# Altium PCB Power_2.PcbDoc
Units mm, origin at the board's own origin, x right, y up, seen from the top; angles counter-clockwise.
Board outline 131.06 x 43.05 mm, 2 copper layers (Top Layer, Bottom Layer); 22 components, 93 nets, 76 pads, 0 vias.
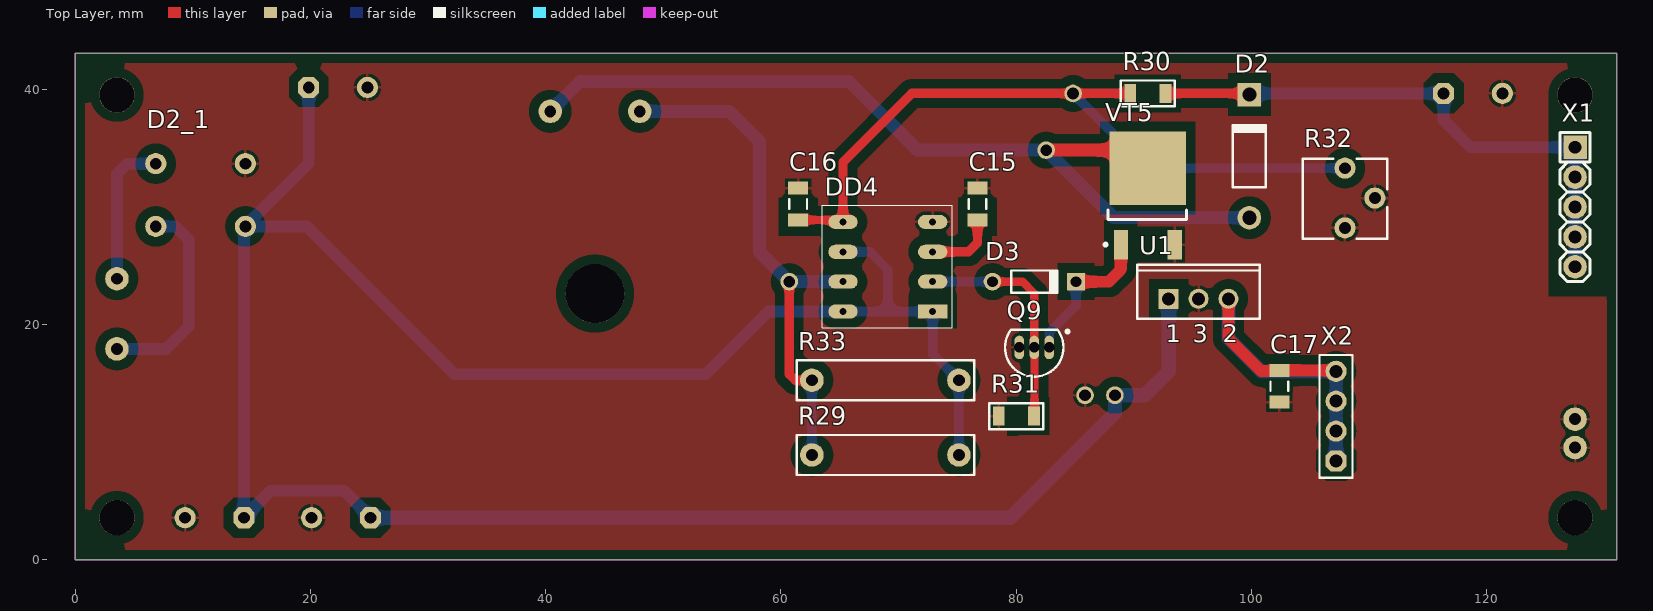
[diagram p0: Top Layer view]
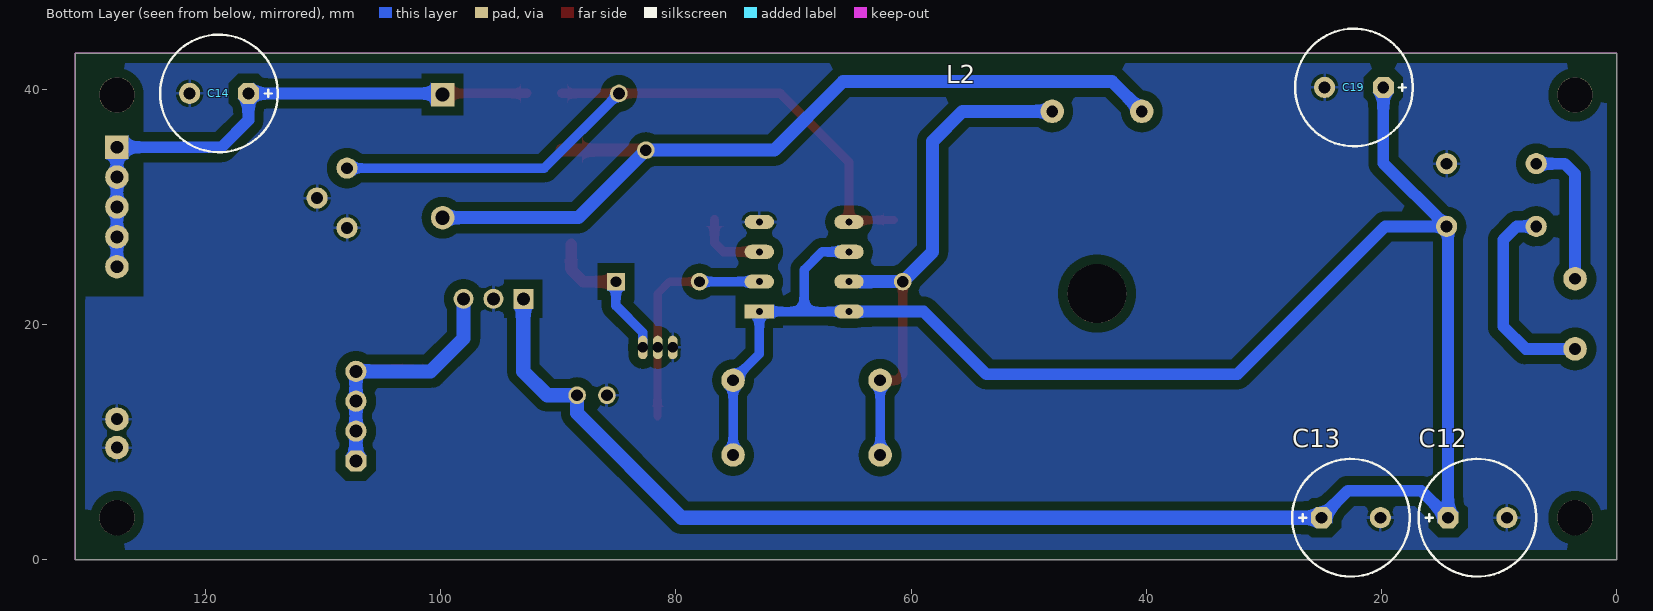
[diagram p1: Bottom Layer view, seen from below]
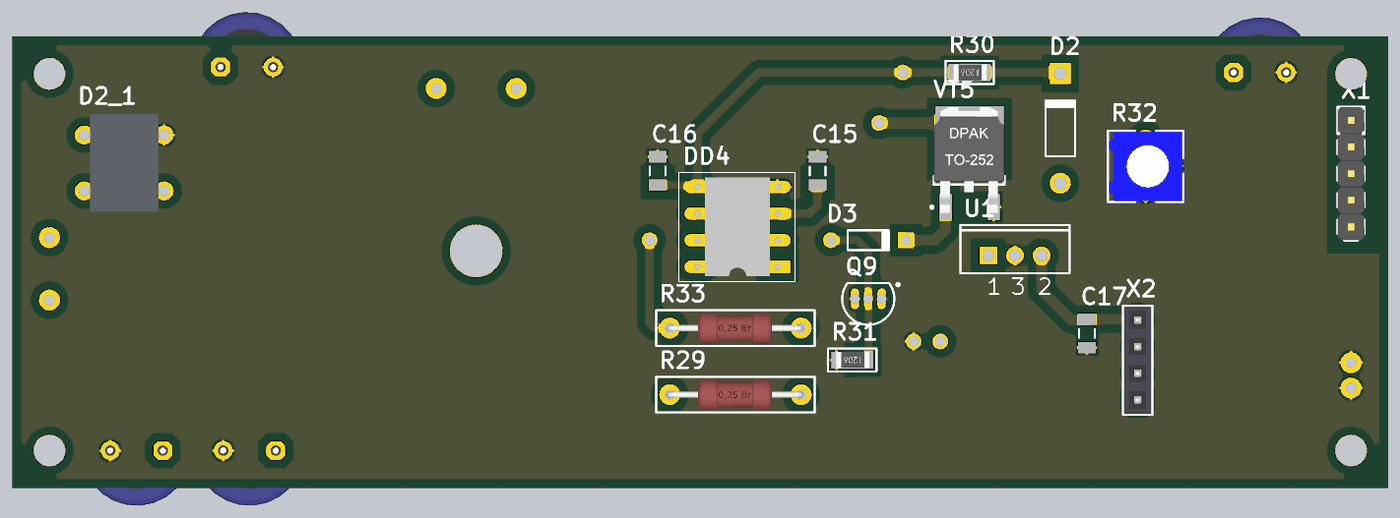
[diagram p2: 3D render of the assembled board from above, using the file's embedded part models]
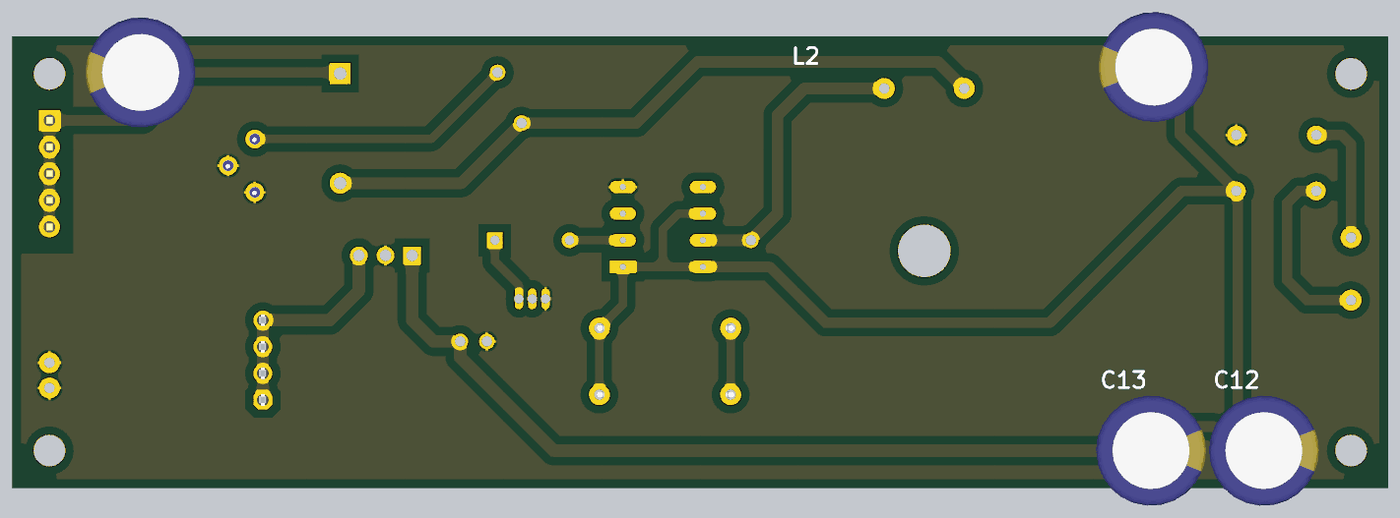
[diagram p3: 3D render of the assembled board from below, using the file's embedded part models]

## Layer stack, top to bottom
Top Solder: solder mask 0.0102, Solder Resist, Dk 3.5
Top Layer: signal copper 0.0356
Dielectric 1: dielectric 0.32, FR-4, Dk 4.8
Bottom Layer: signal copper 0.0356
Bottom Solder: solder mask 0.0102, Solder Resist, Dk 3.5

## Board outline
0,0 0,43.053 131.064,43.053 131.064,0

## Design rules (kind name [scope] priority, off if disabled: settings)
Clearance [All] p1: gap=0.8 ignorepadtopadclearanceinfootprint=FALSE except(0: Arc-Hole Track-Hole SMDPad-Hole THPad-Hole Via-Hole Fill-Hole Poly-Hole Region-Hole Text-Hole)
PolygonConnect [All] p1: connectstyle=Relief reliefconductorwidth=0.254 reliefentries=4 polygonreliefangle="90 Angle" airgapwidth=0.254
RoutingVias [All] p1: holewidth=0.711 width=1.27 viastyle="Through Hole" minholewidth=0.711 minwidth=1.27 maxholewidth=0.711 maxwidth=1.27
SolderMaskExpansion [All] p1: expansion=0.102
Width [All] p1 off: maxlimit=0.254 minlimit=0.254 preferedwidth=0.254
30 further rules are at their usual default settings.

## Classes and differential pairs
component class "Плата управления": C8 C9 C10 C11 X4 X5 X6 X7 X8 X9
component class "Плата питания": C2 C3 C5 C6 C7 L1 X3
component class "Плата питания_2": C15 C16 C17 C18 D2 D3 DD4 L2 Q9 R29 R30 R31 R32 VT5

## Components (designator, comment, footprint, x,y, rotation, side; value= is the part's Value field where it differs from the comment)
C12 "Comment" D10C5H16 11.852,3.556 r180 bottom
C13 "Comment" D10C5H16 22.606,3.556 r180 bottom
C14 "Comment" D10C5H12.5 118.832,39.624 r0 bottom
C15 "Cap" C1206 76.708,30.226 r270 top value=1nF
C16 "Cap" C1206 61.468,30.226 r270 top value=1nF (schematic designator C15)
C17 "Cap" C1206 102.362,14.732 r270 top value=1nF (schematic designator C15)
C19 "Comment" D10C5H16 22.352,40.132 r0 bottom
D2 "Diode 1N4007" DO-41 99.822,34.29 r90 top
D2_1 "Comment" Diode_bridge_DB1 10.668,30.988 r180 top
D3 "Diode 1N4148" DO-35 81.534,23.622 r0 top
DD4 "MC34063" "MAX1771_DIP8 - duplicate" 72.898,21.082 r180 top
L2 "Inductor" Ferrite_ring 44.196,22.86 r180 bottom value=10mH
Q9 "2N3906" TO-92A 81.534,18.034 r90 top
R29 "0.5R" MLT 68.834,8.89 r180 top
R30 "1M" CH1206R 91.186,39.624 r180 top
R31 "1k" CH1206R 80.01,12.192 r180 top
R32 "Comment" "RES: 3362P" 107.95,33.274 r270 top
R33 "0.5R" MLT 68.834,15.24 r180 top (schematic designator R29)
U1 "GL7805" TO220VW 95.504,22.168 r0 top
VT5 "IRF840" DPAK 91.186,30.024 r90 top
X1 "Comment" "CON: PLS-5" 127.508,29.972 r270 top
X2 "Comment" "CON: PBS-4" 107.188,12.192 r90 top

## Footprints (in the part's own frame and the unit in brackets; to place one, negate y for a bottom-side part, rotate by r counter-clockwise, add the part's x,y. Pads: shape width x height; smd on the part's side, far side on the other; paste and mask are expansions set on the pad)
C1206 [mm] "Chip Capacitor, Body 3.2x1.6mm, IPC High Density"
  rect 1.1x1.7 smd: 1(-1.35,0) 2(1.35,0)
  silkscreen extent -0.4,-0.75 0.4,0.75, body extent -1.7,-0.9 1.7,0.9, height 1.3
CH1206R [mm] "Chip Resistor, 2-Leads, Body 3,0x1,5mm, IPC Low Density"
  rect 1x1.6 smd: 1(-1.5,0) 2(1.5,0)
  silkscreen extent -2.3,-1.1 2.3,1.1, body extent -1.65,-0.8 1.55,0.8, height 0.47
"CON: PBS-4" [mm] "PBS-5"
  oct 1.8x1.8 hole 1.1: 1(-3.81,0)
  round 1.8 hole 1.1: 2(-1.27,0) 3(1.27,0) 4(3.81,0)
  silkscreen extent -5.23,-1.4 5.2,1.4, body extent -5.08,-1.27 5.08,1.27, height 8.4
"CON: PLS-5" [mm]
  rect 2x2 hole 1.1: 1(-5.08,0)
  round 2 hole 1.1: 2(-2.54,0) 3(0,0) 4(2.54,0) 5(5.08,0)
  silkscreen extent -6.35,-1.27 6.35,1.27, body extent -6.35,-1.27 6.35,1.27, height 8.54
D10C5H12.5 [mm] "Polar capacitor, diameter 10 mm, leads clearance 5 mm, height 12.5 mm"
  oct 1.8x1.8 hole 1: 1(-2.5,0)
  round 1.8 hole 1: 2(2.5,0)
  silkscreen extent -5,-5 5,5, body extent -5.25,-5.25 5.25,5.25, height 14
D10C5H16 [mm] "Polar capacitor, diameter 10 mm, leads clearance 5 mm, height 16 mm"
  oct 1.8x1.8 hole 1: 1(-2.5,0)
  round 1.8 hole 1: 2(2.5,0)
  silkscreen extent -5,-5 5,5, body extent -5.25,-5.25 5.25,5.25, height 17.5
Diode_bridge_DB1 [mm]
  round 1.8 hole 1: 23(-3.81,2.667) 24(-3.81,-2.667) 25(3.81,2.667) 26(3.81,-2.667)
  body extent -3.25,-4.65 3.25,4.65, height 7.6
DO-35 [mm] "Diode, Axial; Body 3.8 x 1.9 mm (LxDia. max), Lead Dia. 0.53 mm (max)"
  round 1.5 hole 0.9: 1(-3.55,0)
  rect 1.5x1.5 hole 0.9: 2(3.55,0)
  silkscreen extent -1.95,-0.95 2.05,0.95
DO-41 [mm] "Diode, Axial; Body 5.2 x 2.7 mm (LxDia. max), Lead Dia. 0.86 mm (max)"
  round 2 hole 1.2: 1(-5.23,0)
  rect 2x2 hole 1.2: 2(5.23,0)
  silkscreen extent -2.65,-1.4 2.75,1.4
DPAK [mm] "D-Pak, Body 6,2x6,7mm"
  rect 2.5x1.2 smd: 1(-3.25,2.29) 3(-3.25,-2.29)
  rect 6.25x6.5 smd: 2(3.25,0)
  round 0.5 on Mech1: ""(-3.2,2.9)
  silkscreen extent -3.37,-3.3 -0.3,3.71, body extent -3.8,-3.32 6.3,3.42, height 2.37
Ferrite_ring [mm]
  round 2 hole 1: 29(-3.81,15.24) 30(3.81,15.24)
  body extent -12.5,-12.5 12.5,12.5, height 10
"MAX1771_DIP8 - duplicate" [mm]
  rect 2.5x1.2 hole 0.6: 1(0,0)
  oval 2.5x1.2 hole 0.6: 2(0,-2.54) 3(0,-5.08) 4(0,-7.62) 5(7.62,-7.62) 6(7.62,-5.08) 7(7.62,-2.54) 8(7.62,0)
  silkscreen extent -1.65,-9.02 9.4,1.4, body extent 0.71,-8.51 6.91,0.89, height 4.36
MLT [mm]
  round 2 hole 1: 1(-6.3,0) 2(6.2,0)
  silkscreen extent -7.6,-1.7 7.5,1.7, body extent -6.55,-1.5 6.55,1.5, height 3.5
"RES: 3362P" [mm]
  round 1.8 hole 1: 1(0,0) 2(2.54,2.54) 3(5.08,0)
  silkscreen extent -0.8,-3.6 6,3.6, body extent -0.7,-3.49 5.9,3.5, height 4.5
TO220VW [mm] "TO, Thru-Hole, Vertical, Heatsink Mounted; 3 In-Line Leads; Pitch 2.54 mm; Pin sequence 1, 3, 2"
  rect 1.7x1.7 hole 1.1: 1(-2.54,0)
  round 1.7 hole 1.1: 2(2.54,0) 3(0,0)
  silkscreen extent -5.2,-1.7 5.2,2.9
TO-92A [mm] "TO, Flat Index; 3 In-Line, Axial Leads; Body Dia. 4.5mm; Leads 0.51 x 0.48 mm (max)"
  oval 2x0.8 hole 0.9: 1(0,-1.27) 2(0,0) 3(0,1.27)
  silkscreen extent -2.48,-2.96 1.5,2.48, body extent -2.48,-2.5 1.5,2.5, height 6.86

## Part data
C15 C16 C17: library part "Cap Semi", "Capacitor (Semiconductor SIM Model)", LatestRevisionDate=29-May-2009, LatestRevisionNote="IPC-7351 Footprint Added.", PackageDescription="Chip Capacitor", PackageReference=C1206, Published=8-Jun-2000, Publisher="Altium Limited"
D2: "1 Amp General Purpose Rectifier", Code_JEDEC=DO-204-AL, ComponentLink1Description="Manufacturer Link", ComponentLink1URL=http://www.fairchildsemi.com/, ComponentLink2Description=Datasheet, ComponentLink2URL=http://www.fairchildsemi.com/ds/1N%2F1N4001.pdf, DatasheetVersion=1998, LatestRevisionDate=17-Jul-2002, LatestRevisionNote="Re-released for DXP Platform.", PackageDescription="Diode, Axial; Body 5.2 x 2.7 mm (LxDia. max), Lead Dia. 0.86 mm (max)", PackageReference=DO-41, PackageVersion=Aug-1999, Published=8-Jun-2000, Publisher="Altium Limited"
D3: "High Conductance Fast Diode", Code_JEDEC=DO-204-AH, ComponentLink1Description="Manufacturer Link", ComponentLink1URL=http://www.fairchildsemi.com/, ComponentLink2Description=Datasheet, ComponentLink2URL=http://www.fairchildsemi.com/ds/1N%2F1N4148.pdf, DatasheetVersion=1997, LatestRevisionDate=17-Jul-2002, LatestRevisionNote="Re-released for DXP Platform.", PackageDescription="Diode, Axial; Body 3.8 x 1.9 mm (LxDia. max), Lead Dia. 0.53 mm (max)", PackageReference=DO-35, Published=8-Jun-2000, Publisher="Altium Limited"
Q9: "PNP General Purpose Amplifier", ComponentLink1Description="Manufacturer Link", ComponentLink1URL=http://www.fairchildsemi.com/, ComponentLink2Description=Datasheet, ComponentLink2URL=http://www.fairchildsemi.com/ds/2N%2F2N3906.pdf, DatasheetVersion=1997, LatestRevisionDate=15-Jan-2003, LatestRevisionNote="PCB Footprint 'BCY-W3/D4.7' replaced", PackageDescription="TO, Flat Index; 3 In-Line, Axial Leads; Body Dia. 4.5mm; Leads 0.51 x 0.48 mm (max)", PackageReference=TO-92A, PackageVersion=Sep-1998, Published=8-Jun-2000, Publisher="Altium Limited"
R29 R33: library part Resistor, "MLT"
R30 R31: library part Resistor
U1: library part L78S05CV, "2A Positive Voltage Regulator", ComponentLink1Description="Manufacturer Link", ComponentLink1URL=http://www.st.com/, ComponentLink2Description=Datasheet, ComponentLink2URL=http://www.st.com/stonline/products/literature/ds/2148/l78s10c.pdf, DatasheetVersion=Jan-1993, LatestRevisionDate=17-Jul-2002, LatestRevisionNote="Re-released for DXP Platform.", Note="Tab is connected to pin 3 (GND).", PackageDescription="TO, Thru-Hole, Vertical, Heatsink Mounted; 3 In-Line Leads; Pitch 2.54 mm; Pin sequence 1, 3, 2", PackageReference=TO220VW, PackageVersion=Apr-1998, Published=24-Aug-2001, Publisher="Altium Limited"
VT5: library part N-chanel, "Mosfet"
L2: Code_IEC=1005, Code_JEITA=0402, LatestRevisionDate=29-May-2009, LatestRevisionNote="IPC-7351 Footprint Added.", PackageDescription="Chip Inductor", PackageReference=0402-A, Published=8-Jun-2000, Publisher="Altium Limited"

## Free pads (board coordinates)
  round 3 hole 3: 2(3.556,3.556) 2(3.556,39.497) 2(127.508,3.556) 2(127.508,39.497)
  round 2 hole 1: 15(127.508,9.525) 15(127.508,11.938) 32(3.556,17.907) 32(3.556,23.876)
  round 1.5 hole 1: 30(85.852,13.97) 31(88.392,13.97) 33(82.55,34.798) 35(84.836,39.624) 36(60.706,23.622)
  round 5 hole 5: 34(44.196,22.606)

## Nets (pads, with @x,y where several pads share a name; then routed paths per layer and width w, separated by ;. In a path a pad name is that pad's centre, name@x,y a point inside that pad or via, vN(x,y) a via of type N, cw(c..) or ccw(c..) an arc to the next point about the centre after c; other vN are vias at no path point)
"9В AC": 
"12В AC": 
+5В: C17.1 U1.2 X2.1 X2.2 X2.3 X2.4 | length 35.3
  Top Layer w1: U1.2 98.044,18.796 100.838,16.002 C17.1@102.616,16.002 ; C17.1 107.108,16.082 X2.4
  Bottom Layer w1.1: X2.1 X2.2 X2.3 X2.4
  Bottom Layer w1.2: U1.2 98.044,18.796 100.838,16.002 X2.4
+12В: 
+180В: 
DHT11_PB4: 
DIG0: 
DIG1: 
DIG2: 
DIG3: 
DIG4: 
DIG5: 
DIG6: 
DIG7: 
DIG8: 
DIG9: 
GND: C12.2 C13.2 C14.2 C15.1 C16.1 C17.2 C19.2 D2_1.24 DD4.4 pad.15 pad.30 Q9.3 R31.2 R32.2 R32.3 U1.3 VT5.3
IN1: 
IN2: 
IN3: 
IN4: 
L1: 
L2: 
L3: 
L4: 
L5: 
L6: 
L7: 
L8: 
L9: D2_1.25 pad.32@3.556,17.907 | length 17.5
  Bottom Layer w1: pad.32@3.556,17.907 7.747,17.907 9.652,19.812 9.652,27.178 8.509,28.321 D2_1.25
L10: D2_1.26 pad.32@3.556,23.876 | length 11.8
  Bottom Layer w1: pad.32@3.556,23.876 3.556,32.766 4.445,33.655 D2_1.26@6.096,33.655
NetC5_1: 
NetC12_1: C12.1 C13.1 C19.1 D2_1.23 DD4.1 DD4.6 DD4.8 pad.31 R29.1 R33.1 U1.1 | length 218.6
  Bottom Layer w0.254: C13.1 C13.1@25.106,3.596
  Bottom Layer w0.8: DD4.8 69.088,21.082 ; DD4.6 67.564,26.162 69.088,24.638 69.088,21.082 ; R29.1 R33.1 72.898,17.476 DD4.1 69.088,21.082
  Bottom Layer w1: C19.1 19.852,33.695 D2_1.23 ; C13.1@25.106,3.596 22.86,5.842 16.638,5.842 C12.1 14.352,28.195 D2_1.23 ; DD4.8 58.928,21.082 53.594,15.748 32.258,15.748 19.685,28.321 D2_1.23
  Bottom Layer w1.2: C13.1 79.502,3.556 88.392,12.446 pad.31 90.932,13.97 92.964,16.002 U1.1
NetC14_1: C14.1 D2.2 R30.1 X1.1 X1.2 X1.3 X1.4 X1.5 | length 48.2
  Top Layer w0.8: R30.1 D2.2@99.822,39.624
  Bottom Layer w1: D2.2@99.822,39.624 C14.1 116.332,37.338 118.618,35.052 X1.1 X1.2 X1.3 X1.4 X1.5
NetC15_2: C15.2 DD4.3 | length 6.1
  Top Layer w0.8: DD4.3 75.946,26.162 76.708,26.924 C15.2
NetC16_1: C16.2 DD4.5 pad.35 R30.2 R32.1 | length 61.5
  Top Layer w0.254: DD4.5@65.104,28.876 DD4.5
  Top Layer w0.7: C16.2 DD4.5@65.104,28.876
  Top Layer w0.8: DD4.5 65.278,33.782 71.12,39.624 pad.35 R30.2
  Bottom Layer w0.8: pad.35 91.186,33.274 R32.1
NetD1_1: 
NetD2_1: D2.1 L2.30 pad.33 VT5.2 | length 74.6
  Top Layer w0.254: VT5.2@89.662,34.798 VT5.2
  Top Layer w1.1: pad.33 VT5.2@89.662,34.798
  Bottom Layer w1.1: L2.30 42.926,40.64 65.786,40.64 71.628,34.798 pad.33 88.288,29.06 D2.1
NetD3_1: D3.1 DD4.2 Q9.2 R31.1 | length 19.5
  Top Layer w0.7: D3.1 80.518,23.622 81.534,22.606 Q9.2 81.558,18.01 R31.1@81.558,12.192
  Bottom Layer w0.8: DD4.2 D3.1
NetD3_2: D3.2 Q9.1 VT5.1 | length 12.9
  Top Layer w1: D3.2 87.884,23.622 88.896,24.634 VT5.1
  Bottom Layer w0.8: Q9.1 82.804,19.304 85.09,21.59 85.09,23.616 D3.2
NetDD1_1: 
NetDD1_3: 
NetDD1_8: 
NetDD2_3: 
NetDD2_4: 
NetDD2_6: 
NetDD2_7: 
NetDD4_7: DD4.7 L2.29 pad.36 R29.2 R33.2 | length 45.1
  Top Layer w0.8: pad.36 60.706,15.748 61.214,15.24 R33.2
  Bottom Layer w0.8: R29.2 R33.2
  Bottom Layer w1.1: L2.29 55.626,38.1 58.166,35.56 58.166,26.162 pad.36 DD4.7
NetHG1_11: 
NetHG2_11: 
NetHG3_11: 
NetHG4_11: 
NetHG5_2: 
NetQ1_2: 
NetQ2_2: 
NetQ3_2: 
NetQ4_2: 
NetQ5_2: 
NetQ5_3: 
NetQ6_2: 
NetQ6_3: 
NetQ7_2: 
NetQ7_3: 
NetQ8_2: 
NetQ8_3: 
NetR1_1: 
NetR1_2: 
NetR2_1: 
NetR2_2: 
NetR3_1: 
NetR3_2: 
NetR4_2: 
NetR5_2: 
NetR6_2: 
NetR7_2: 
NetR8_2: 
NetR9_2: 
NetR10_2: 
NetR11_2: 
NetR13_2: 
PC0: 
PC1: 
PC2: 
PC3: 
RGB1: 
RGB2: 
RGB3: 
RTC_SCL: 
RTC_SDA: 
VCC: 
XTAL1: 
XTAL2: 
ИНС-1: 
pads on no net: VT5.

## Polygon pours and split planes (outlines as drawn)
GND on Top Layer "Top layer" (solid, remove dead copper, pour order 0): 0,43.053 131.064,43.053 131.064,0 0,0
GND on Bottom Layer "Bottom Layer" (solid, remove dead copper, pour order 2): 0,43.053 131.064,43.053 131.064,0 0,0

## Keep-outs
Keep-Out Layer:
  the board outline again, w0.1

## Other copper
Top Layer:
  pour cut-out: 125.208,39.497 125.222,39.483 125.222,22.352 130.174,22.352 130.175,22.351 130.175,39.497
  pour cut-out: 92.622,28.278 90.296,28.278 90.296,25.27 92.622,25.27
  pour cut-out: 101.219,14.732 101.258,14.693 101.258,14.186 103.466,14.186 103.505,14.225 103.505,14.732
  pour cut-out: 80.21,13.792 80.159,13.843 79.248,13.843 79.248,10.541 80.159,10.541 80.21,10.592
  pour cut-out: 75.058,30.226 75.058,30.733 75.057,30.734 75.095,30.772 78.321,30.772 78.359,30.734 78.358,30.733 78.358,30.226
  pour cut-out: 59.818,30.226 59.818,30.733 59.817,30.734 59.855,30.772 63.081,30.772 63.119,30.734 63.118,30.733 63.118,30.226
Bottom Layer:
  pour cut-out: 130.175,39.497 125.208,39.497 125.222,39.483 125.222,22.352 130.174,22.352 130.214,22.312

## Text inside footprints (layer, text, board x,y; h text height)
U1: Top Overlay "3" at 95.004,18.493 h1.5; Top Overlay "2" at 97.544,18.493 h1.5; Top Overlay "1" at 92.714,18.493 h1.5